# Altium PCB corePCB.PcbDoc (part 2 of 2)
Units mil, origin at the board's own origin, x right, y up, seen from the top; angles counter-clockwise.
Board outline 3543.31 x 3543.31 mil, 4 copper layers (Top Layer, Layer 1, Layer 2, Bottom Layer), stack 23.756 mil thick; 90 components, 158 nets, 640 pads, 386 vias.
Unrouted connection lines stored in the file: 1.
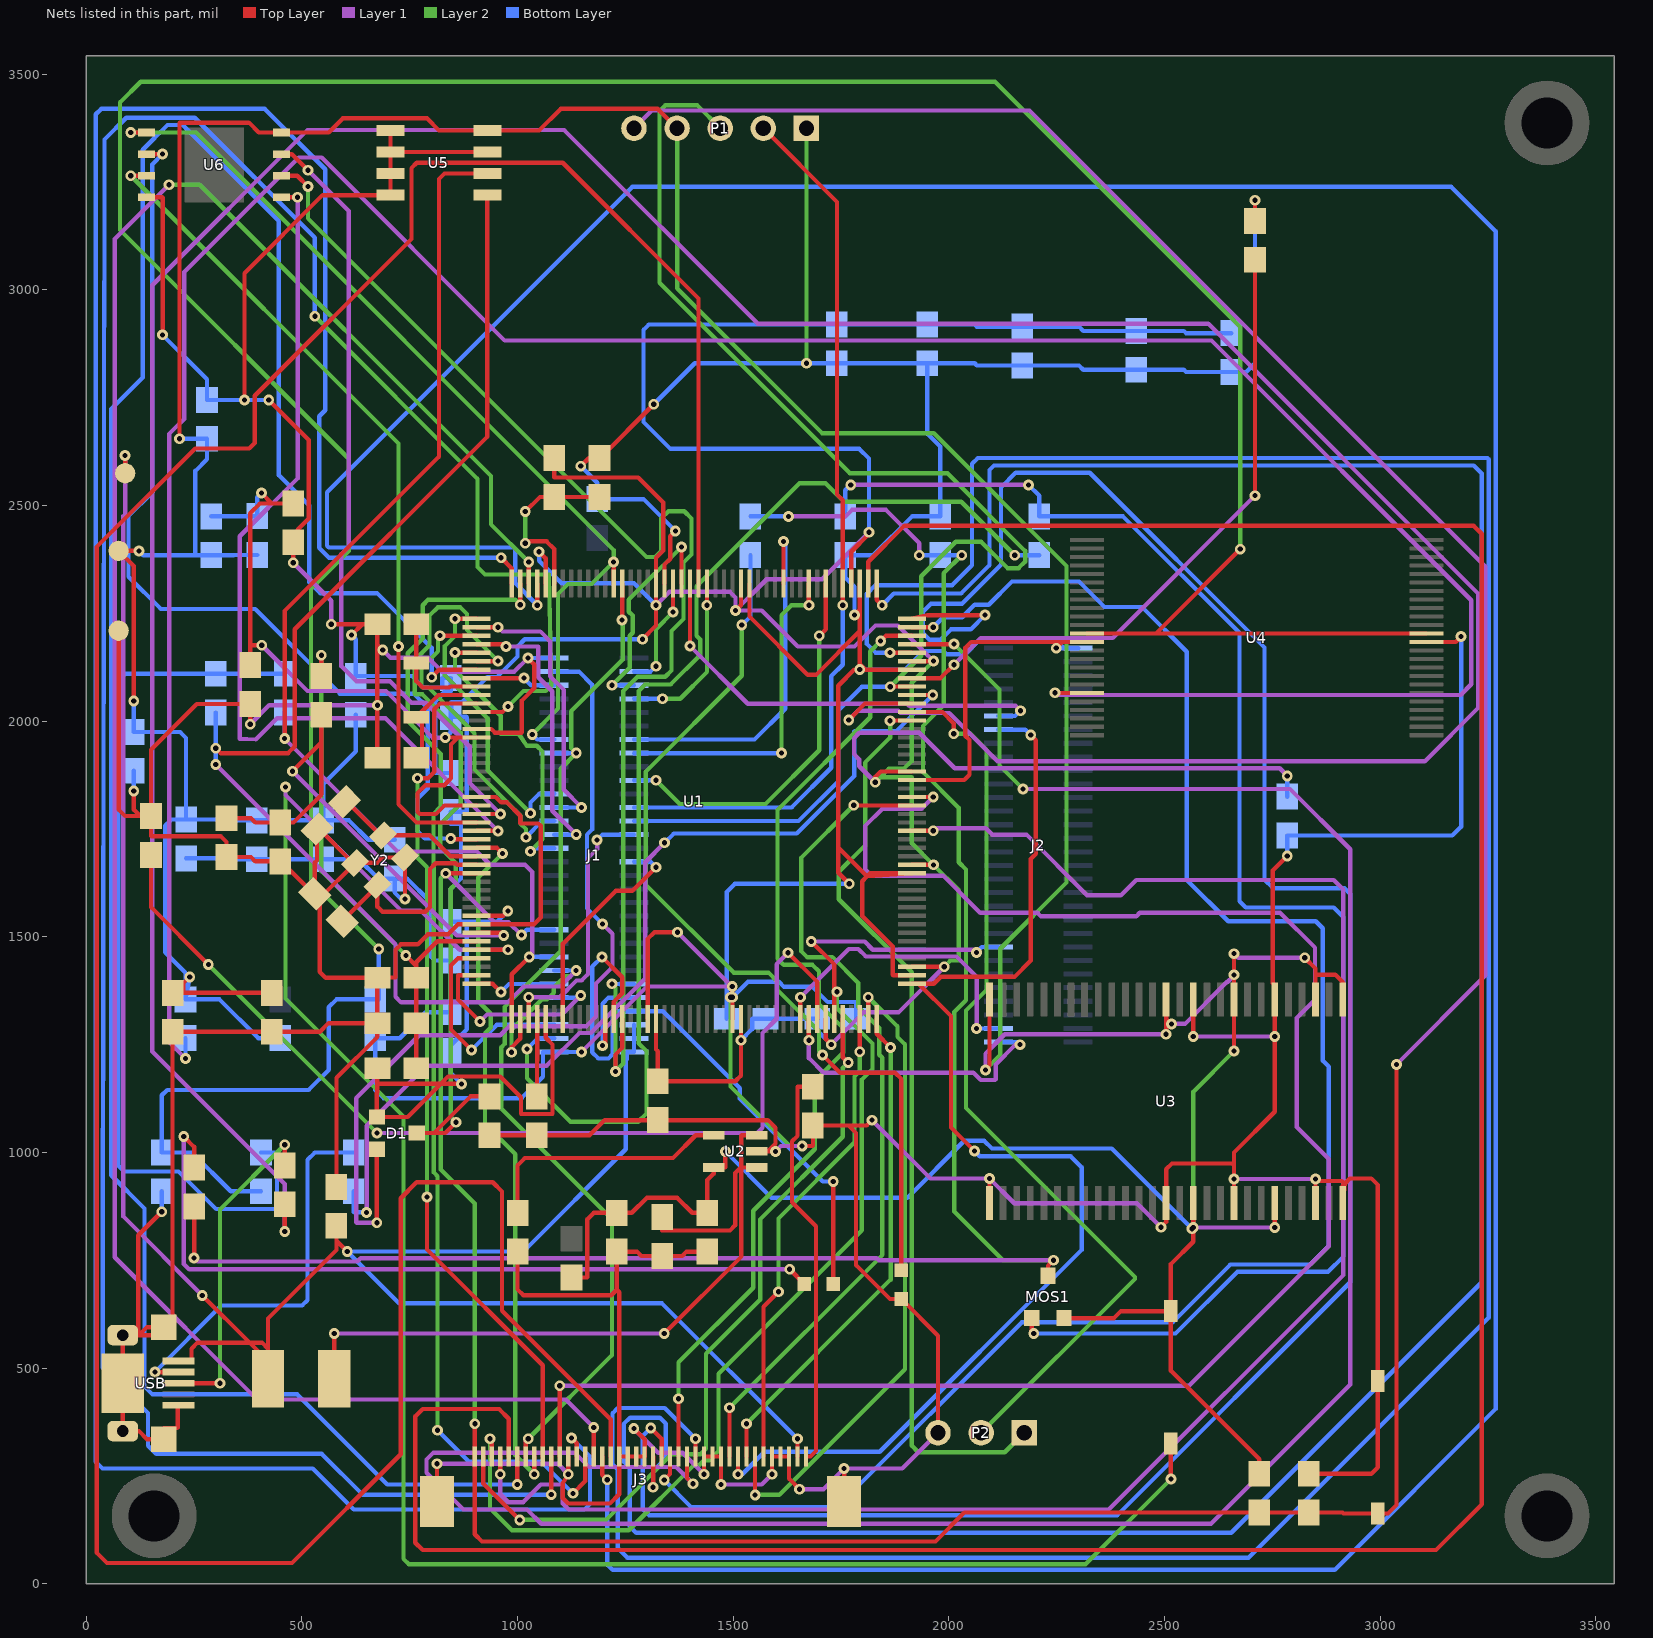
[diagram p4: the nets of this part, all layers, seen from the top]

## Via types
v1: diameter 25, hole 12, Top Layer to Bottom Layer, 386 vias

## Nets (pads, with @x,y where several pads share a name; then routed paths per layer and width w, separated by ;. In a path a pad name is that pad's centre, name@x,y a point inside that pad or via, vN(x,y) a via of type N, cw(c..) or ccw(c..) an arc to the next point about the centre after c; other vN are vias at no path point) (continued)
GND: C1.2 C2.1 C3.2 C4.1 C5.2 C6.1 C7.1 C8.1 C9.1 C10.1 C11.1 C12.2 C13.1 C14.1 C15.1 C16.1 C17.1 C18.1 C19.1 C20.1 C21.1 C22.1 C23.1 C24.1 C25.1 C26.1 C27.1 C28.1 C29.1 C30.1 C31.1 C32.1 C33.2 C34.2 C35.1 C36.1 C37.1 C38.1 C39.1 C40.1 C41.1 C42.1 C43.1 C44.2 C45.2 GND.1 J1.1 J1.30 J2.31 J3.3 J3.4 J3.5 J3.11 J3.12 J3.13 J3.20 J3.21 J3.22 J3.23 J3.29 J3.A J3.B P1.1 P2.3 PWR.2 R1.2 R4.2 R7.2 R14.1 RST.2 U1.14 U1.22 U1.37 U1.61 U1.71 U1.90 U1.102 U1.113 U1.126 U1.135 U1.148 U1.158 U2.2 U3.6 U3.12 U3.28 U3.41 U3.46 U3.52 U3.54 U4.13 U4.36 U5.1 U5.2 U5.3 U5.4 U5.7 U6.4 USB.5 USB.6 USB.7 USB.8 USB.9 Y2.2 Y2.4 | length 31309.2
  Top Layer w10: GND.1@75,2210 75,1795 90,1780 125,1780 ; v1(110,1838) 110,1795 125,1780 ; U6.4@140,3215 176,3215 177,3214 v1(177,2895.94) ; v1(175.06,862.5) 120.5,807.94 120.5,576.22 ; USB.9@180,595 140.78,595 122,576.22 ; USB.5@214,413.82 212,413.82 212,362 211,361 180,361 USB.8@180,335 140.78,335 122,353.78 USB.7@84.65,353.78 84.65,409 85,409.35 USB.9@85,465 85,520 84.65,520.35 USB.6@84.65,576.22 120.5,576.22 ; v1(367,2745) 367,3039 548,3220 U5.4@705.59,3220 U5.3@705.59,3270 U5.2@705.59,3320 ; v1(380,1993) 380.06,1993.06 C26.1@380.06,2040 256.06,2040 150.06,1934 C3.2@150.06,1780 ; v1(423,2745) 516,2652 516,2470 491.5,2445.5 C25.1@480,2415 v1(480,2367.5) ; v1(568,2224.94) 640,2224.94 ; C33.2@580.06,920 580.06,1173.06 675,1268 C6.1@675,1299.94 ; v1(615,2199.94) 640,2224.94 ; C9.1@675,1914.94 v1(675,2037) 675,2165 675,2177.5 ; v1(687.5,2165) 675,2177.5 ; U5.1@705.59,3370 U5.2@705.59,3320 ; v1(739.03,1588) Y2.2@739.03,1684.03 687.53,1684.03 675,1671.5 Y2.4@623.5,1671.5 ; J3.B@813.4,190.57 v1(813.4,278) ; U1.22@905.3,1824.39 949.35,1824.39 961.98,1811.76 975.74,1811.76 1006.5,1781 1006.5,1764 1007.5,1763 1048.5,1763 1054,1757.5 1054,1545 1038.11,1529.11 U1.37@905.3,1529.11 862,1529.11 838.89,1506 792.03,1506 768.53,1482.5 729.5,1482.5 717,1470 717,1405.94 C7.1@675,1404.94 ; U1.14@905.3,1981.87 939.13,1981.87 947.5,1973.5 1009,1973.5 1010,1974.5 1010,2047.98 1038.5,2076.48 1038.5,2131.96 v1(1024,2146.46) ; U5.7@930,3320 U5.2@705.59,3320 ; C1.2@934.94,1040 R1.2@1044.94,1040 1167,1040 1202,1075 C17.1@1325.06,1075 1580.5,1075 1598,1057.5 1598,1020 1580.4,1002.4 ; C30.1@1000.06,770 1000.06,682.5 1013.56,669 1217.5,669 1230.06,681.56 ; J3.29@1117.52,295 v1(1117.52,254) 1104.89,233 1104.89,198.61 1117.5,186 1214.13,186 1235.63,207.5 J3.23@1235.63,295 ; v1(1146.47,2591.47) 1165,2610 R4.2@1190.06,2610 1191,2610 v1(1316,2735) ; v1(1269.69,360) 1294.69,335 J3.20@1294.69,295 J3.21@1275,295 J3.22@1255.32,295 J3.23@1235.63,295 ; U1.61@1301.58,1310 1301.58,1495 1317.38,1510.8 v1(1371.12,1510.8) ; U1.158@1340.95,2319.09 1340.95,2363.45 1354,2376.5 1354,2429.05 v1(1365.95,2441) ; v1(1432.48,253.88) J3.13@1432.48,295 J3.12@1452.17,295 J3.11@1471.85,295 v1(1471.85,230) ; C32.1@1440.06,770 1392,770 1382,760 C29.1@1335.06,760 1287,760 1277,770 C31.1@1230.06,770 1230.06,681.56 ; v1@1496.93,1385 v1(1498,1385) 1498.43,1384.57 v1(1498.43,1360) v1@1498.43,1359.57 ; v1(1498,1360) v1@1498.43,1359.57 ; U1.71@1498.43,1310 v1@1498.43,1359.57 ; U1.148@1537.8,2319.09 1537.8,2242.82 1673.11,2107.5 1691.98,2107.5 1793.7,2209.22 ; U2.2@1555,1002.4 1580.4,1002.4 ; v1(1589.96,253.88) J3.5@1589.96,295 J3.4@1609.65,295 J3.3@1629.33,295 1629.33,243.67 v1(1654,219) ; v1(1598,1002.4) 1580.4,1002.4 ; v1(1660,1015) 1684,1015 1685,1016 C28.1@1685,1062.4 1767.6,1062.4 ; J3.A@1757.28,190.57 v1(1757.28,267) ; v1(1769,1623) 1743.51,1648.49 1743.51,1707.5 ; v1(1781.2,2246.5) 1793.7,2259 ; v1(1793.7,2120) 1793.7,2132.5 ; U1.135@1793.7,2319.09 1793.7,2259 ; v1(1822,1074.9) 1809.5,1062.4 1767.6,1062.4 ; U1.90@1914.39,1411 1871,1411 1870,1412 1870,1477.5 1799.19,1548.31 1799.19,1628.92 1810.64,1640.37 ; U1.113@1914.39,1863.76 2036,1863.76 2048,1875.76 2048,1956.5 2038,1966.5 2038,2170 2051.74,2183.74 2263.29,2183.74 ; U1.126@1914.39,2119.67 1806.54,2119.67 ; P2.3@1975,350 1975,575 PWR.2@1890,660 1863.74,660 1785,738.74 1785,1045 1767.6,1062.4 ; U3.28@2094.53,882.56 v1(2094.53,939.43) ; v1(2249,2169.45) 2263.29,2183.74 ; U4.13@2320,2183.74 2263.29,2183.74 ; v1(2491.91,826.46) 2503.98,838.52 U3.41@2503.98,882.56 2503.98,960.95 2517.5,974.48 2656.98,974.48 2661.46,970 ; v1(2566.97,1268.68) U3.12@2566.97,1355 ; U3.46@2661.46,882.56 v1(2661.46,938.57) 2661.46,970 ; v1(2710,3208) 2710.06,3207.94 C5.2@2710.06,3160 ; v1(2785,1687.5) 2751.44,1653.94 2751.44,1393 2755.95,1388.5 U3.6@2755.95,1355 v1(2755.95,1268.68) 2755.95,1094.49 2661.46,1000 2661.46,970 ; C12.2@2835.06,255 2980,255 2995,270 RST.2@2995,470 2995,924.43 2980,939.43 2930,939.43 2918,927.43 ; U3.52@2850.43,882.56 v1@2850.43,933 ; v1(2850.43,938.57) v1@2850.43,933 ; U4.36@3107.4,2183.74 3175.5,2183.74 v1(3188,2196.24) ; 120.5,576.22 122,576.22 ; 122,576.22 181.28,576.22 200.06,595 C42.1@200.06,1280 C43.1@430.06,1280 542,1280 561.94,1299.94 C6.1@675,1299.94 ; 125,1780 C3.2@150.06,1780 ; C3.2@150.06,1780 150.06,1734 151.06,1733 312.06,1733 325.06,1720 C2.1@325.06,1685 382,1685 392,1675 C4.1@450.06,1675 452,1675 527.05,1599.95 C10.1@529.95,1599.95 529.95,1672 535.05,1677.09 C11.1@535.05,1749.95 540,1749.95 618.45,1671.5 Y2.4@623.5,1671.5 ; Y2.4@623.5,1671.5 541.06,1589.07 541.06,1418.87 555,1404.94 C7.1@675,1404.94 ; 640,2224.94 C8.1@675,2224.94 675,2177.5 ; C6.1@675,1299.94 C7.1@675,1404.94 ; 1230.06,681.56 1235.63,676 J3.23@1235.63,295 ; 1743.51,1707.5 1743.51,2082.18 1781,2119.67 1793.7,2119.67 1806.54,2119.67 ; 1743.51,1707.5 1810.64,1640.37 ; 1793.7,2132.5 1806.54,2119.67 ; 1793.7,2132.5 1793.7,2209.22 ; 1793.7,2209.22 1793.7,2246.5 1793.7,2259 ; 1810.64,1640.37 1817.5,1647.22 U1.102@1914.39,1647.22 1810.64,1640.37 ; v1@2850.43,933 2850.53,933 2911.43,934 2918,927.43 ; 2918,927.43 2913.43,922.86 U3.54@2913.43,882.56 2918,927.43
  Layer 1 w10: v1(380,1993) 424,2037 v1(675,2037) ; v1(480,2367.5) 568,2279.5 v1(568,2224.94) ; v1(687.5,2165) 705.47,2147.03 792.47,2147.03 824.5,2115 992.54,2115 v1(1024,2146.46) ; v1(813.4,278) 1093.52,278 v1(1117.52,254) ; v1(1148.5,1233.07) 1300.43,1385 v1@1496.93,1385 ; v1(1269.69,360) 1326.39,303.3 1383.06,303.3 v1(1432.48,253.88) ; v1(1371.12,1510.8) v1@1496.93,1385 ; v1(1471.85,230) 1566.08,230 v1(1589.96,253.88) ; v1(1498,1385) v1@1496.93,1385 ; v1(1598,1002.4) 1610.6,1015 v1(1660,1015) ; v1(1654,219) 1709.28,219 v1(1757.28,267) 1892,267 P2.3@1975,350 ; v1(1822,1074.9) 1957.47,939.43 v1(2094.53,939.43) 2151.96,882 2436.37,882 v1(2491.91,826.46) ; v1(2566.97,1268.68) v1(2755.95,1268.68) ; v1(2661.46,938.57) v1(2850.43,938.57)
  Layer 2 w10: v1(1494,1360) 1494,1152.91 1631.91,1015 v1(1660,1015) ; v1(1670,2830) P1.1@1670,3375
  Bottom Layer w10: v1(110,1838) C37.1@110,1885 ; v1(175.06,862.5) C36.1@175.06,910 ; v1(177,2895.94) 279.94,2793 C44.2@279.94,2745 v1(367,2745) v1(423,2745) ; C38.1@231.38,1681.93 312,1681.93 313.93,1680 C39.1@394.94,1680 C40.1@549.94,1680 632,1680 677,1635 C41.1@714.94,1635 ; v1(615,2199.94) 624.94,2190 C45.2@624.94,2105 755,2105 781.77,2078.23 825.06,2078.23 825.06,2100 C13.1@845.06,2100 845.06,2069.5 832.5,2069.5 809,2046 809,1881 810,1880 C14.1@845.06,1880 ; v1(739.03,1588) 730,1588 714.94,1603.06 C41.1@714.94,1635 ; v1(1024,2146.46) J1.30@1084.96,2146.46 ; v1(1146.47,2591.47) 1184.94,2553 R7.2@1184.94,2515 1291.95,2515 v1(1365.95,2441) ; v1(1148.5,1233.07) J1.1@1084.96,1233.07 1059,1233.07 1059,1175.5 1009.5,1126 689.06,1126 670.06,1145 C35.1@670.06,1265 727,1265 787,1325 C16.1@845.06,1325 845.06,1384 844.94,1384.13 C15.1@844.94,1445 809,1445 796.5,1457.5 796.5,1582.5 744,1635 C41.1@714.94,1635 ; v1(1316,2735) 1411,2830 v1(1670,2830) C20.1@1740,2830 C21.1@1949.94,2830 ; C18.1@1485,1310.06 1485,1347 ; v1(1494,1360) 1485,1351 ; v1(1498,1360) 1485,1347 ; v1(1498.43,1360) 1534.41,1395.98 1606.02,1395.98 1618,1384 1684,1384 1719,1349 1784,1349 1785,1348 C19.1@1785,1309.94 ; v1(1769,1623) 1504,1623 1485,1604 1485,1351 ; v1(1781.2,2246.5) 1781.2,2311.8 1760.06,2332.94 R14.1@1760.06,2385 1825,2385 1915,2475 C34.2@1980.06,2475 1980.06,2637 1949.94,2667.13 C21.1@1949.94,2830 ; v1(1793.7,2120) 1899,2120 1942,2163 1988,2163 1996,2155 2038,2155 2070,2187 2249,2187 2266.55,2169.45 ; v1(2249,2169.45) 2266.55,2169.45 ; J2.31@2300.04,2169.45 2266.55,2169.45 ; v1(2710,3208) 2710,2830 2690,2810 C24.1@2655,2810 2550,2810 2545,2815 C23.1@2434.94,2815 2312,2815 2302,2825 C22.1@2170,2825 2065,2825 2060,2830 C21.1@1949.94,2830 ; v1(2785,1687.5) C27.1@2785,1735 3167.5,1735 3188,1755.5 v1(3188,2196.24) ; 1485,1347 1485,1351
IIC_SCL: J1.8 R20.1 U1.45 U5.6 | length 2743.3
  Top Layer w10: v1(459.94,1960) 459.94,2255.44 818,2613.5 818,3257.5 830.5,3270 U5.6@930,3270 ; U1.45@986.61,1310 986.61,1413.09 v1(1027.06,1453.54)
  Layer 1 w10: v1(459.94,1960) 721.94,1698 905.87,1698 936.87,1667 1017.5,1667 1034,1650.5 1034,1460.48 v1(1027.06,1453.54)
  Bottom Layer w10: v1(459.94,1960) R20.1@459.94,2020 ; v1(1027.06,1453.54) J1.8@1084.96,1453.54
IIC_SDA: J1.7 R21.1 U1.46 U5.5 | length 3353.9
  Top Layer w10: v1(300.06,1937.44) 311.5,1926 468,1926 483.44,1941.44 483.44,2213.44 930,2660 U5.5@930,3220 ; v1(986,1232.5) 986,1243.7 1006.3,1264 U1.46@1006.3,1310
  Layer 1 w10: v1(300.06,1899.94) 717,1483 717,1361 730,1348 977,1348 1014,1385 1098.88,1385 v1(1135.92,1422.05)
  Layer 2 w10: v1(986,1232.5) 986,1284.62 1014.74,1313.37 1025,1313.37 1026.18,1314.54 1026.18,1324.8 1055.97,1354.59 1068.42,1354.59 1083.83,1370 1083.83,1382.45 1110.23,1408.85 1122.73,1408.85 v1(1135.92,1422.05)
  Bottom Layer w10: v1(300.06,1899.94) v1(300.06,1937.44) R21.1@300.06,2020 ; J1.7@1084.96,1422.05 v1(1135.92,1422.05)
JTCK: J1.42 P1.2 U1.137 | length 2066.1
  Top Layer w10: P1.2@1570,3375 1741,3204 1741,2526 1754.33,2512.67 U1.137@1754.33,2319.09 1754.33,2269.33 v1(1754,2269)
  Bottom Layer w10: J1.42@1270,1800 1635.5,1800 1727.51,1892.01 1727.51,2104.51 1754,2131 v1(1754,2269)
JTMS: J1.43 P1.3 U1.124 | length 3158.2
  Top Layer w10: v1(1864.3,2080) 1864.59,2080.3 U1.124@1914.39,2080.3
  Layer 2 w10: P1.3@1470,3375 1417,3428 1342.5,3428 1329,3414.5 1329,3016.62 1770.62,2575 1997,2575 2177,2395 2177,2370 2162,2355 2136.1,2355 2075.04,2416.06 2016.06,2416.06 1936,2336 1936,2151.7 v1(1864.3,2080)
  Bottom Layer w10: J1.43@1270,1768.5 1651.5,1768.5 1743.51,1860.51 1743.51,2025 1798.51,2080 v1(1864.3,2080)
KEY0: J1.6 U1.44 | length 195.4
  Top Layer w10: U1.44@905.3,1391.32 942.18,1391.32 v1(961.5,1372)
  Bottom Layer w10: v1(961.5,1372) 980.05,1390.55 J1.6@1084.96,1390.55
KEY1: J1.5 U1.43 | length 493.9
  Top Layer w10: U1.43@905.3,1411 862.82,1411 861.81,1410 861.81,1354.69 v1(913,1303.5)
  Layer 1 w10: v1(913,1303.5) 929.5,1320 1102.55,1320 v1(1146.55,1364)
  Bottom Layer w10: J1.5@1084.96,1359.05 1141.61,1359.05 v1(1146.55,1364)
KEY2: J1.28 U1.8 | length 186.5
  Top Layer w10: U1.8@905.3,2099.98 v1(1015,2099.98)
  Bottom Layer w10: v1(1015,2099.98) 1031.52,2083.46 J1.28@1084.96,2083.46
LCD_B3: J3.24 U1.154 | length 7440.2
  Top Layer w10: J3.24@1215.95,295 1215.95,381.05 964,633 964,909.5 942.5,931 766,931 729,894 729,300 477,48 48,48 24,72 24,2404 252.5,2632.5 378,2632.5 390.5,2645 390.5,2754.5 754,3118 754,3282.5 766.5,3295 1105,3295 1419.69,2980.31 U1.154@1419.69,2319.09
LCD_B4: J3.25 U1.173 | length 9017.1
  Top Layer w10: v1(1045.67,2269) U1.173@1045.67,2319.09 ; J3.25@1196.26,295 1196.26,252.74 v1(1208,241)
  Bottom Layer w10: v1(1045.67,2269) 994.5,2320.17 994.5,2399.5 991,2403 562,2403 558,2407 558,2531 1266,3239 3165,3239 3268,3136 3268,405 2895,32 1221,32 1208,45 v1(1208,241)
LCD_B5: J3.26 U1.174 | length 5192.3
  Top Layer w10: U1.174@1025.99,2319.09 v1(1025.99,2369) ; J3.26@1176.58,295 v1(1176.58,362)
  Layer 1 w10: v1(192,3244) 66,3118 66,757 396,427 1111.58,427 v1(1176.58,362)
  Layer 2 w10: v1(192,3244) 263,3244 938.5,2568.5 938.5,2456.49 v1(1025.99,2369)
LCD_B6: J3.27 U1.175 | length 2726.9
  Top Layer w10: v1(1006.3,2270.2) U1.175@1006.3,2319.09 ; v1(1128.39,209.5) 1156.89,238 J3.27@1156.89,295
  Layer 2 w10: v1(814.5,356) 814.5,945 806,953.5 806,1671 805,1672 805,1785 822,1802 822,1924 745.5,2000.5 745.5,2157.5 780,2192 780,2269 792.5,2281.5 995,2281.5 v1(1006.3,2270.2)
  Bottom Layer w10: v1(814.5,356) 888,282.5 1055.39,282.5 v1(1128.39,209.5)
LCD_B7: J3.28 U1.176 | length 6521.6
  Top Layer w10: v1(962,2379) 986.61,2354.39 U1.176@986.61,2319.09 ; v1(1125,338) 1137.21,325.79 J3.28@1137.21,295
  Bottom Layer w10: v1(962,2379) 563,2379 540,2402 540,2707 554,2721 554,3280 414,3420 34.5,3420 22,3407.5 22,282.5 37.5,267 525,267 620,172 1155,172 1168,185 1168,295 v1(1125,338)
LCD_BL: J1.23 J3.34 U1.163 | length 2391.1
  Top Layer w10: J3.34@1019.1,295 1019.1,330.1 v1(1025,336) ; v1(1242.52,2234.48) U1.163@1242.52,2319.09
  Layer 2 w10: v1(1025,336) 1219,530 1219,845 962.5,1101.5 962.5,1244 970,1251.5 970,1337.5 1100,1467.5 1100,1889.98 v1(1136,1925.98) 1124.24,1937.74 1124.24,2023.24 1244,2143 1244,2233 v1(1242.52,2234.48)
  Bottom Layer w10: J1.23@1084.96,1925.98 v1(1136,1925.98)
LCD_CLK: J3.30 U1.111 | length 4282.1
  Top Layer w10: J3.30@1097.84,295 v1(1097.84,459) ; U1.111@1914.39,1824.39 1963.61,1824.39 v1(1964,1824)
  Layer 1 w10: v1(1097.84,459) 2557,459 2881,783 2881,985 2807,1059 2807,1312 2849,1354 2849,1475 2768,1556 2443,1556 2434.5,1547.5 2214,1547.5 2206,1555.5 2073,1555.5 1986.5,1642 1821.5,1642 1806,1657.5 1806,1757 1846,1797 1937,1797 v1(1964,1824)
LCD_DE: J3.33 U1.28 | length 1633.5
  Top Layer w10: U1.28@905.3,1706.28 952.22,1706.28 v1(965,1693.5) ; v1(1038.78,254) J3.33@1038.78,295
  Layer 2 w10: v1(965,1693.5) 909,1637.5 909,1350.5 938,1321.5 938,1289.98 924.64,1276.61 924.64,1066.36 995,996 995,297.78 v1(1038.78,254)
LCD_G2: J3.14 U1.128 | length 6777.5
  Top Layer w10: J3.14@1412.8,295 v1(1412.8,336.2) ; v1(1864,2159) v1(1864,2159) U1.128@1914.39,2159.04
  Bottom Layer w10: v1(1412.8,336.2) 1341.5,407.5 1232.5,407.5 1220,395 1220,277.14 1232.26,264.88 1232.26,82.5 1254.76,60 2695,60 3252,617 3252,2607.5 3249,2610.5 2067.5,2610.5 2054,2597 2054,2361.5 2008.14,2315.64 1830,2315.64 1810,2295.64 1810,2179 1830,2159 v1(1864,2159)
LCD_G3: J3.15 U1.129 | length 5636.6
  Top Layer w10: J3.15@1393.11,295 1393.11,245.39 v1(1406.75,231.75) ; U1.129@1914.39,2178.72 2011.72,2178.72 v1(2012,2179)
  Layer 1 w10: v1(1406.75,231.75) 1368,270.5 1165.5,270.5 1132,304 805,304 789,288 789,257.5 874.5,172 1022,172 1055,139 2608,139 2931,462 2931,1703 2791,1843 v1(2172,1843)
  Layer 2 w10: v1(2012,2179) 2117.5,2073.5 2117.5,1897.5 v1(2172,1843)
LCD_G4: J3.16 U1.130 | length 2327.5
  Top Layer w10: J3.16@1373.43,295 v1(1373.43,429) ; v1(1842,2186) 1854.41,2198.41 U1.130@1914.39,2198.41
  Layer 2 w10: v1(1373.43,429) 1373.43,513.43 1546.5,686.5 1546.5,865 1689,1007.5 1689,1165 1755,1231 1755,1288.5 1699,1344.5 1699,1420 1684,1435 1617.5,1435 1603,1449.5 1603,1794 1818,2009 1818,2162 v1(1842,2186)
LCD_G5: J3.17 U1.131 | length 4259.9
  Top Layer w10: v1(1340,240.52) 1353.74,254.26 J3.17@1353.74,295 ; U1.131@1914.39,2218.09 1964,2218.09 v1(1964.09,2218)
  Bottom Layer w10: v1(1340,240.52) 1402.52,178 1741,178 2169,606 2519,606 2653,740 2838,740 2881,783 2881,1199 2867,1213 2867,1520 2851,1536 2648,1536 2552,1632 2552,2161 2448,2265 2361,2265 2302,2324 2146.56,2324 2092.53,2269.97 2059.97,2269.97 2031,2241 1987.09,2241 v1(1964.09,2218)
LCD_G6: J3.18 U1.132 | length 5386.2
  Top Layer w10: v1(1309,361) 1334.06,335.94 J3.18@1334.06,295 ; U1.132@1914.39,2237.78 1950.22,2246 v1(2084,2246)
  Bottom Layer w10: v1(1309,361) 1290,342 1290,174 1305,159 2391,159 2931,699 2931,1599.5 2917.5,1613 2751.5,1613 2732,1632.5 2732,2171 2327,2576 2155,2576 2121,2542 2121,2363 2030.54,2272.54 1958.54,2272.54 1940,2254 1940,2204 1955,2189 1981,2189 2005,2213 2051,2213 v1(2084,2246)
LCD_G7: J3.19 U1.133 | length 6399.7
  Top Layer w10: v1(1314,223.46) 1314.37,223.84 J3.19@1314.37,295 ; U1.133@1833.07,2319.09 1833.07,2281.43 v1(1845.5,2269)
  Bottom Layer w10: v1(1314,223.46) 1314,261 1344,291 1344,371 1330,385 1261,385 1246,370 1246,283.14 1260.5,268.64 1260.5,132.5 1275,118 2655,118 3236,699 3236,2574.5 3217.5,2593 2105,2593 2094.56,2582.56 2094.56,2361.95 2028.61,2296 1872.5,2296 v1(1845.5,2269)
LCD_HSYNC: J3.31 U1.12 | length 6315.9
  Top Layer w10: U1.12@905.3,2021.24 965.24,2021.24 v1(978,2034) ; v1(1078,206.5) 1078.15,206.65 J3.31@1078.15,295
  Layer 2 w10: v1(530,2939) 907,2562 907,2357.5 924.5,2340 1073,2340 1078,2082.5 1065.5,2070 1014,2070 v1(978,2034)
  Bottom Layer w10: v1(530,2939) 530,3121 251.5,3399.5 92.5,3399.5 42,3349 38,729 38,501 143,396 143,320 162,301 546,301 640.5,206.5 v1(1078,206.5)
LCD_R3: J3.6 U1.86 | length 1107.5
  Top Layer w10: J3.6@1570.28,295 1570.28,642.28 v1(1605,677) ; v1(1793.7,1233.5) U1.86@1793.7,1310
  Layer 2 w10: v1(1605,677) 1605,847 1781.5,1023.5 1781.5,1176.17 1793.7,1188.37 v1(1793.7,1233.5)
LCD_R4: J3.7 U1.87 | length 1505.1
  Top Layer w10: J3.7@1550.59,295 1550.59,206.41 v1(1551,206) ; U1.87@1813.39,1310 v1(1813.39,1360)
  Layer 2 w10: v1(1551,206) 1607,206 1898.39,497.39 1898.39,1250.68 1881.08,1268 1881.08,1292.31 v1(1813.39,1360)
LCD_R5: J3.8 U1.88 | length 1166.7
  Top Layer w10: J3.8@1530.91,295 1530.91,370.91 v1(1531,371) ; U1.88@1833.07,1310 1833.07,1275.18 v1(1865.08,1243.18)
  Layer 2 w10: v1(1531,371) 1865.08,705.08 v1(1865.08,1243.18)
LCD_R6: J2.24 J3.9 U1.89 | length 2861.6
  Top Layer w10: v1(1511,254) 1511.22,254.22 J3.9@1511.22,295 ; U1.89@1914.39,1391.32 U1.89@1930,1391.32 ; v1(2059.5,1003.5) 2005,1058 2005,1316.32 U1.89@1930,1391.32 ; v1(2190,1968) 2202,1956 2202,1692.6 2190,1680.6 2190,1445 2152.19,1407.19 1981.19,1407.19 1965.32,1391.32 U1.89@1930,1391.32
  Bottom Layer w10: v1(1511,254) 1521,254 1573,306 1840,306 2308,774 2308,965.5 2282.5,991 2072,991 v1(2059.5,1003.5) ; J2.24@2115,1980.47 2177.53,1980.47 v1(2190,1968)
LCD_R7: J3.10 U1.110 | length 1954.6
  Top Layer w10: J3.10@1491.54,295 v1(1491.54,408) ; v1(1779.5,1805) 1779.79,1804.71 U1.110@1914.39,1804.71
  Layer 2 w10: v1(1491.54,408) 1846,762.46 1846,1219.68 1838.89,1226.78 1838.89,1288.61 1789.89,1337.61 1789.89,1393.16 1730.06,1452.99 1671.51,1452.99 1657.65,1466.85 1657.65,1683.15 v1(1779.5,1805)
LCD_VSYNC: J3.32 U1.11 | length 1987.4
  Top Layer w10: v1(768,1867.71) 792.5,1867.71 807,1882.21 807,2027.93 820,2040.93 U1.11@905.3,2040.93 ; v1(790,897) 790,775 1058.47,506.53 J3.32@1058.47,295
  Layer 2 w10: v1(768,1867.71) 768,1683.39 790,1661.39 v1(790,897)
LED0: DS0.2 J1.57 U1.57 | length 1485.3
  Top Layer w10: v1(1196,1453.5) 1243,1406.5 1243,1369 1222.84,1348.84 U1.57@1222.84,1310 ; DS0.2@1731.93,695 v1(1731.93,932.63)
  Bottom Layer w10: v1(1196,1453.5) 1173,1430.5 1173,1232.5 1187.5,1218 1211,1218 1221,1228 1221,1326.56 1222,1327.56 J1.57@1270,1327.56 1337,1327.56 1515.34,1149.22 1515.34,1125.04 1707.75,932.63 v1(1731.93,932.63)
LED1: J1.56 U1.56 | length 241.1
  Top Layer w10: v1(1197,1247.65) 1203.15,1253.8 U1.56@1203.15,1310
  Bottom Layer w10: v1(1197,1247.65) 1197,1345 1211.05,1359.05 J1.56@1270,1359.05
NetC1_1: C1.1 D1.3 U1.6 | length 1843.4
  Top Layer w10: D1.3@766.26,1045 806.06,1045 ; v1(857.5,1070) 832.5,1045 806.06,1045 ; U1.6@905.3,2139.35 v1(955,2139.35) ; C1.1@934.94,1130 891.06,1130 806.06,1045
  Layer 2 w10: v1(857.5,1070) 845,1082.5 845,1611.72 857,1623.72 857,1670.72 821,1706.72 821,1761.55 868,1808.55 868,1974 779.77,2062.23 763,2062.23 761.5,2063.73 761.5,2141.5 796,2176 796,2245 815,2264 867.5,2264 883,2248.5 883,2211.35 v1(955,2139.35)
NetC2_2: C2.2 C4.2 R2.1 U1.38 | length 1244.3
  Top Layer w10: C2.2@325.06,1775 382,1775 392,1765 C4.2@450.06,1765 480.5,1765 545.06,1829.56 545.06,1951.06 ; v1(478,1884) 545.06,1951.06 ; R2.1@545.06,2015 545.06,1951.06 ; U1.38@905.3,1509.43 961.57,1509.43 v1(968,1503)
  Layer 1 w10: v1(478,1884) 859,1503 v1(968,1503)
NetC3_1: C3.1 U1.81 | length 2372.4
  Top Layer w10: C3.1@150.06,1690 150.06,1568.94 v1(283,1436) ; v1(1627.28,1463) 1695.28,1395 U1.81@1695.28,1310
  Layer 1 w10: v1(674,1045) 1555.5,1045 1568,1057.5 1568,1277 1601,1310 1601,1436.72 v1(1627.28,1463)
  Layer 2 w10: v1(283,1436) v1(674,1045)
NetC5_1: C5.1 U1.125 | length 1517.9
  Top Layer w10: U1.125@1914.39,2099.98 1980.98,2099.98 v1(2012,2131) ; v1(2710.06,2523.06) C5.1@2710.06,3070
  Layer 1 w10: v1(2012,2131) 2074,2193 2380,2193 v1(2710.06,2523.06)
NetC8_2: C8.2 U1.9 Y1.1 | length 279.4
  Top Layer w10: C8.2@765,2224.94 Y1.1@765,2135 765,2093 780,2078 842,2078 844.3,2080.3 U1.9@905.3,2080.3
NetC9_2: C9.2 U1.10 Y1.2 | length 282.7
  Top Layer w10: C9.2@765,1914.94 778.5,1914.94 778.5,2009.02 Y1.2@765,2009.02 816.59,2060.61 U1.10@905.3,2060.61
NetC10_2: C10.2 U1.30 Y2.1 | length 501.2
  Top Layer w10: C10.2@593.59,1536.32 593.59,1537 Y2.1@675,1618.41 ; Y2.1@675,1620 Y2.1@675,1618.41 ; U1.30@905.3,1666.91 860.23,1666.91 856.42,1670.72 810.14,1670.72 796.92,1657.5 796.92,1568.92 786,1558 687,1558 675,1570 Y2.1@675,1618.41
NetC11_2: C11.2 U1.29 Y2.3 | length 359.2
  Top Layer w10: C11.2@598.68,1813.59 604,1813.59 682.06,1735.53 Y2.3@687.53,1735.53 796.06,1735.53 844.87,1686.72 872.42,1686.72 872.55,1686.59 U1.29@905.3,1686.59
NetC28_2: C28.2 J3.1 | length 937
  Top Layer w10: J3.1@1668.7,295 1679.5,295 1692,307.5 1692,829 1636.5,884.5 1636.5,1026 1649,1038.5 1649,1151.4 1650,1152.4 C28.2@1685,1152.4
NetC29_2: C29.2 F1.2 U2.1 U2.3 | length 1895.8
  Top Layer w10: F1.2@575,475 v1(575,580) ; C29.2@1335.06,850 1335.06,819.5 1335.56,819 1492.5,819 1505,831.5 1505,952.5 1517.5,965 1519,965 ; v1(1340,580) 1519,759 1519,965 ; U2.1@1555,965 1519.5,965 ; U2.3@1555,1039.8 1520,1039.8 1519,1038.8 ; 1519,965 1519.5,965 ; 1519,965 1519,965.5 ; 1519,965.5 1519,1038.8 ; 1519,965.5 1519.5,965 ; 1519,965.5 1518.5,966 1518.5,1038.3 1519,1038.8
  Layer 1 w10: v1(575,580) v1(1340,580)
NetC30_2: C30.2 U2.4 | length 593.8
  Top Layer w10: C30.2@1000.06,860 1000.06,970 1017.06,987 1360.39,987 1413.2,1039.8 U2.4@1455,1039.8
NetC35_2: C35.2 C36.2 R16.1 U4.12 U4.37 | length 7913.4
  Top Layer w10: U4.12@2320,2203.43 2480.43,2203.43 ; v1(2676,2399) 2480.43,2203.43 ; U4.37@3107.4,2203.43 2480.43,2203.43
  Layer 2 w10: v1(678,1472) 521,1629 521,2307 608.5,2394.5 608.5,2608.57 78.21,3138.86 78.21,3435 126.21,3483 2107,3483 2676,2914 v1(2676,2399)
  Bottom Layer w10: R16.1@405.06,910 335,910 245,1000 C36.2@175.06,1000 175.06,1132.5 187.56,1145 515.5,1145 562,1191.5 562,1337 580,1355 C35.2@670.06,1355 678,1355 v1(678,1472)
NetDS0_1: DS0.1 R10.2 | length 1835.7
  Top Layer w10: v1(226,1037) 250,1013 R10.2@250,965 ; v1(1631,729) DS0.1@1665,695
  Layer 1 w10: v1(226,1037) 226,741.5 238.5,729 v1(1631,729)
NetMOS1_1: MOS1.1 R13.2 R14.2 | length 3644.9
  Top Layer w10: MOS1.1@2192.6,615.79 2192.6,584.31 v1(2196.9,580)
  Layer 1 w10: v1(1772.56,2548) v1(2185,2548)
  Bottom Layer w10: R14.2@1760.06,2475 1760.06,2535.5 v1(1772.56,2548) ; v1(2185,2548) 2210.06,2522.94 R13.2@2210.06,2475 2404,2475 2674,2205 2674,1582.5 2688.5,1568 2892.5,1568 2915,1545.5 2915,759 2879.55,723.55 2669.46,723.55 2525.91,580 v1(2196.9,580)
NetPWR_1: PWR.1 R15.1 | length 2126
  Top Layer w10: v1(1707,1226) 1748,1185 1875,1185 1890,1170 PWR.1@1890,726.93
  Layer 2 w10: v1(1520,2223) 1520,2105.5 1297,1882.5 1297,1621.5 1501.5,1417 1582.14,1417 1601.91,1397.23 1601.91,1378.09 1699.09,1280.91 1699.09,1233.91 v1(1707,1226)
  Bottom Layer w10: v1(1520,2223) 1540.06,2243.06 R15.1@1540.06,2385
NetR1_1: R1.1 U1.48 | length 180.3
  Top Layer w10: R1.1@1044.94,1130 1044.94,1212.27 1045.67,1213.01 U1.48@1045.67,1310
NetR4_1: R4.1 R5.1 U1.171 | length 416.2
  Top Layer w10: v1(1018,2412.5) 1022.5,2417 1067.5,2417 1085.04,2399.46 U1.171@1085.04,2319.09 ; v1(1018,2486) 1052,2520 R5.1@1085.06,2520 R4.1@1190.06,2520
  Layer 2 w10: v1(1018,2412.5) v1(1018,2486)
NetR11_2: R11.2 USB.3 | length 759.2
  Top Layer w10: USB.3@214,465 v1(310,465) ; v1(460,1018) 460.06,1017.94 R11.2@460.06,970
  Layer 2 w10: v1(310,465) 310,868 v1(460,1018)
NetR12_2: R12.2 USB.2 | length 917.7
  Top Layer w10: v1(159,491) 159.41,490.59 USB.2@214,490.59
  Bottom Layer w10: v1(159,491) 313,645 500.5,645 513,657.5 513,983 530,1000 R12.2@620,1000
NetR18_1: R18.1 U4.19 | length 6666.9
  Top Layer w10: v1(2246.18,2066) 2246.55,2065.63 U4.19@2320,2065.63
  Layer 1 w10: v1(230,1218) 192,1256 192,2666 227,2701 227,3041.5 492.5,3307 546,3307 970,2883 2609,2883 3211.5,2280.5 3211.5,2085.5 3187,2061 2251.18,2061 v1(2246.18,2066)
  Bottom Layer w10: v1(230,1218) 230.06,1218.06 R18.1@230.06,1265
NRF_CE: J2.25 U1.155 | length 1028.9
  Top Layer w10: v1(1400,2174.5) U1.155@1400,2319.09
  Layer 1 w10: v1(1400,2174.5) 1534,2040.5 1903.5,2040.5 1908.26,2035.74 2154.73,2035.74 v1(2166,2024.47)
  Bottom Layer w10: J2.25@2115,2011.97 2153.5,2011.97 v1(2166,2024.47)
NRF_CS: J1.34 U1.153 | length 400.4
  Top Layer w10: v1(1439,2269) 1439.37,2269.37 U1.153@1439.37,2319.09
  Layer 2 w10: v1(1336,2051.97) 1377.08,2051.97 1439.5,2114.39 1439.5,2268.5 v1(1439,2269)
  Bottom Layer w10: J1.34@1270,2051.97 v1(1336,2051.97)
PA0: U1.40 WKUP.1 | length 4607.8
  Top Layer w10: U1.40@905.3,1470.06 977.88,1470.06 v1(977.94,1470) ; v1(2515,243) WKUP.1@2515,325
  Layer 1 w10: v1(462,1847.5) 462,1829 730,1561 775,1561 866,1470 v1(977.94,1470)
  Layer 2 w10: v1(462,1847.5) 462,1357 735.5,1083.5 735.5,57.5 748,45 2317,45 v1(2515,243)
PA1: J1.3 U1.41 | length 498.3
  Top Layer w10: v1(893.5,1237.5) 845.81,1285.19 845.81,1434.19 862,1450.37 U1.41@905.3,1450.37
  Bottom Layer w10: v1(893.5,1237.5) 952.06,1296.06 J1.3@1084.96,1296.06
PA3: J1.44 U1.47 | length 620.1
  Top Layer w10: U1.47@1025.99,1310 v1(1026,1360)
  Layer 1 w10: v1(1026,1360) 1098.05,1360 1136.59,1398.55 1148.55,1398.55 1163.5,1413.5 1163.5,1682.47 1184.5,1703.47 v1(1184.5,1724.51)
  Bottom Layer w10: v1(1184.5,1724.51) 1197,1737.01 J1.44@1270,1737.01
PA5: J1.46 U1.51 | length 519.8
  Top Layer w10: U1.51@1104.73,1310 1104.73,1483.73 1227.52,1606.52 1266.02,1606.52 v1(1321,1661.5)
  Bottom Layer w10: J1.46@1270,1674.02 1308.48,1674.02 v1(1321,1661.5)
PA9: P2.1 U1.120 | length 2136.5
  Top Layer w10: v1(1864,2001) 1864.56,2001.56 U1.120@1914.39,2001.56
  Layer 2 w10: v1(1864,2001) 1864,1962 1806.01,1904.01 1806.01,1712.01 1745.01,1651.01 1745.01,1587.24 1914.39,1417.85 1914.39,320 1929.39,305 2130,305 P2.1@2175,350
PA10: P2.2 U1.121 | length 2136.8
  Top Layer w10: U1.121@1914.39,2021.24 1985.26,2021.24 2011.5,1995 v1(2011.5,1971)
  Layer 2 w10: v1(2011.5,1971) 2050.39,1971 2087.5,1933.89 2087.5,1376.5 2040,1329 2040,1103 2431.62,711.38 2431.62,706.62 P2.2@2075,350
PA11: R11.1 U1.122 | length 8049
  Top Layer w10: v1(460.06,817) R11.1@460.06,880 ; v1(1768,2003) 1805.93,2040.93 U1.122@1914.39,2040.93
  Layer 1 w10: v1(460.06,817) 460.06,926.94 153,1234 153,3011 513,3371 1108,3371 1557,2922 2601.67,2922 3227.5,2296.17 3227.5,2030.5 3104,1907 2113,1907 2001,2019 1888,2019 1882.5,2024.5 1789.5,2024.5 v1(1768,2003)
PA12: R12.1 U1.123 | length 2273.4
  Top Layer w10: U1.123@1914.39,2060.61 1962.61,2060.61 v1(1963,2061)
  Layer 1 w10: v1(650,861) 650,1062 789,1201 1067.5,1201 1143.5,1277 1169.8,1277 1296,1403.2 1296,1673 v1(1341,1718)
  Bottom Layer w10: R12.1@620,910 620,862 621,861 v1(650,861) ; v1(1341,1718) 1362.48,1739.48 1647.48,1739.48 1781,1873 1781,1976 1782,1977 1879,1977 v1(1963,2061)
PB2: J1.55 U1.58 U6.6 | length 3233.8
  Top Layer w10: U6.6@452.99,3265 489,3265 v1(514,3240) ; v1(1227,1187.96) 1227,1226.99 1242.52,1242.51 U1.58@1242.52,1310
  Layer 2 w10: v1(514,3240) 514,3166 1299,2381 1319,2381 1333,2395 1333,2470 1350,2487 1386.5,2487 1403.5,2470 1403.5,2386.54 1385,2368.04 1385,2237 1357,2209 1357,2117.5 1342.5,2103 1278,2103 1245,2070 1245,1205.96 v1(1227,1187.96) 1227,1383 v1(1219,1391)
  Bottom Layer w10: v1(1219,1391) 1219.45,1390.55 J1.55@1270,1390.55
PB6: J1.24 U1.164 U6.1 | length 2201.6
  Top Layer w10: v1(103,3365) U6.1@140,3365 ; U1.164@1222.84,2319.09 v1(1222.84,2369.08)
  Layer 2 w10: v1(103,3365) 255,3365 1222.84,2397.16 v1(1222.84,2369.08) 1171.76,2318 1117,2318 1094,2295 1094,2029.5 v1(1034,1969.5)
  Bottom Layer w10: v1(1034,1969.5) 1046.02,1957.48 J1.24@1084.96,1957.48
PB10: J2.2 U1.79 | length 702.2
  Top Layer w10: U1.79@1655.91,1310 1655.91,1359.91 v1(1656,1360)
  Layer 1 w10: v1(1656,1360) 1768,1472 1790,1472 1807.8,1454.19 2017.97,1454.19 2064.5,1407.66 v1(2064.5,1287.56)
  Bottom Layer w10: v1(2064.5,1287.56) J2.2@2115,1287.56
PB11: J2.1 U1.80 | length 708.3
  Top Layer w10: v1(1675.59,1260) U1.80@1675.59,1310
  Layer 1 w10: v1(1675.59,1260) 1675.59,1218.82 1709.41,1185 2057,1185 2074,1168 2107.21,1168 2108.71,1169.5 2108.71,1204 2154.71,1250 v1(2165,1250)
  Bottom Layer w10: J2.1@2115,1256.06 2158.94,1256.06 v1(2165,1250)
PC10: J1.40 U1.139 | length 896.9
  Top Layer w10: v1(1699.73,2198) 1714.96,2213.23 U1.139@1714.96,2319.09
  Layer 2 w10: v1(1321,1863) 1376,1808 1575,1808 1699.73,1932.73 v1(1699.73,2198)
  Bottom Layer w10: J1.40@1270,1862.99 v1(1321,1863)
PC12: J1.38 U1.141 | length 785.2
  Top Layer w10: v1(1675.59,2269) U1.141@1675.59,2319.09
  Layer 2 w10: v1(1612,1925.98) 1612,2246 1635,2269 v1(1675.59,2269)
  Bottom Layer w10: J1.38@1270,1925.98 v1(1612,1925.98)
PD2: J1.37 U1.144 | length 867.5
  Top Layer w10: U1.144@1616.54,2319.09 1616.54,2416.07 v1(1617,2416.54)
  Bottom Layer w10: J1.37@1270,1957.48 1549.48,1957.48 1621,2029 1621,2412.54 v1(1617,2416.54)
PE2: J1.20 U1.1 | length 681.9
  Top Layer w10: v1(854.78,2237.78) U1.1@905.3,2237.78
  Layer 2 w10: v1(854.78,2237.78) 854.78,2197.78 831.5,2174.5 831.5,2106.09 931,2006.59 931,1885.5 v1(1030,1786.5)
  Bottom Layer w10: v1(1030,1786.5) 1030,1811.5 1050,1831.5 J1.20@1084.96,1831.5
PE3: J1.19 U1.2 | length 663
  Top Layer w10: U1.2@905.3,2218.09 v1(955,2218.09)
  Layer 1 w10: v1(955,2218.09) 965.09,2208 1053,2208 1076,2185 1076,2104 1107.5,2072.5 1107.5,1841 v1(1148.5,1800)
  Bottom Layer w10: J1.19@1084.96,1800 v1(1148.5,1800)
PE4: J1.18 U1.3 | length 760.2
  Top Layer w10: v1(820,2198.41) U1.3@905.3,2198.41
  Layer 2 w10: v1(820,2198.41) 815.5,2193.91 815.5,2162 777.5,2124 777.5,2079.73 779,2078.23 793.77,2078.23 900,1972 900,1888 1006.5,1781.5 1006.5,1763 1019.5,1750 v1(1019.5,1731)
  Bottom Layer w10: v1(1019.5,1731) 1057,1768.5 J1.18@1084.96,1768.5
PE5: J1.17 U1.4 | length 668.2
  Top Layer w10: U1.4@905.3,2178.72 967.63,2178.72 v1(973,2173.35)
  Layer 1 w10: v1(973,2173.35) 1047,2173.35 1048,2172.35 1048,2102 1080.5,2069.5 1080.5,1792.5 v1(1136,1737)
  Bottom Layer w10: J1.17@1084.96,1737.01 v1(1136,1737)
PE6: J1.16 U1.5 | length 700.5
  Top Layer w10: v1(855,2159.04) U1.5@905.3,2159.04
  Layer 2 w10: v1(855,2159.04) 855,2118.78 961,2012.78 961,1971.2 1003.58,1970.2 1021.54,1942.99 1044.5,1942.99 1058,1929.49 1058,1726.5 v1(1029.74,1698.24)
  Bottom Layer w10: v1(1029.74,1698.24) 1037.01,1705.51 J1.16@1084.96,1705.51
PF6: U1.24 U6.7 | length 1888.2
  Top Layer w10: U6.7@452.99,3315 476.5,3315 v1(514,3277.5) ; U1.24@905.3,1785.02 v1(960.5,1785.02)
  Layer 1 w10: v1(514,3277.5) 608.5,3183 608.5,2404 591.5,2387 591.5,2127.57 626.52,2092.55 704.26,2092.55 754.08,2042.74 787.26,2042.74 889,1941 889,1856.52 v1(960.5,1785.02)
PF7: U1.25 U6.3 | length 1950.7
  Top Layer w10: v1(103,3265) U6.3@140,3265 ; v1(724,2173.24) 724,1807.21 765.87,1765.34 U1.25@905.3,1765.34
  Layer 2 w10: v1(103,3265) 724,2644 v1(724,2173.24)
PF8: U1.26 U6.5 | length 2125.5
  Top Layer w10: U6.5@452.99,3215 v1(490,3215) ; U1.26@905.3,1745.65 v1(955,1745.65)
  Layer 1 w10: v1(490,3215) 490,2563 356,2429 356,1959.5 393,1957.5 442.5,2007 693.65,2007 v1(955,1745.65)
PF9: U1.27 U6.2 | length 2310.8
  Top Layer w10: U6.2@140,3315 v1(177,3315) ; v1(845,1728) 847.03,1725.97 U1.27@905.3,1725.97
  Bottom Layer w10: v1(177,3315) 153,3291 153,2531 98,2476 98,2335 173,2260 392,2260 588,2064 759,2064 792,2031 792,1844 768,1820 768,1745 785,1728 v1(845,1728)
PG3: J3.37 U1.107 | length 4326.9
  Top Layer w10: v1(960,254) v1(960,254) J3.37@960.04,295 ; U1.107@1914.39,1745.65 1963.65,1745.65 v1(1964,1746)
  Layer 1 w10: v1(960,254) 960,207.5 978.5,189 1013,189 1054,230 1103.89,230 1104.89,229 1104.89,186 1118.89,172 2371,172 2915,716 2915,1609.5 2892.5,1632 2434.5,1632 2399,1596.5 2320.5,1596.5 2180,1737 2101,1737 2086,1752 1970,1752 v1(1964,1746)
PG13: J1.33 U1.156 | length 530.7
  Top Layer w10: v1(1380,2404) 1380.32,2403.68 U1.156@1380.32,2319.09
  Layer 2 w10: v1(1219,2083.46) 1260,2124.46 1260,2198 1267,2205 1267,2245 1258,2254 1258,2282 v1(1380,2404)
  Bottom Layer w10: v1(1219,2083.46) J1.33@1270,2083.46
PG14: J1.32 U1.157 | length 264.2
  Top Layer w10: v1(1360.63,2252.98) U1.157@1360.63,2319.09
  Layer 2 w10: v1(1321,2127.46) 1321,2213.35 v1(1360.63,2252.98)
  Bottom Layer w10: J1.32@1270,2114.96 1308.5,2114.96 v1(1321,2127.46)
PH6: J2.8 J3.38 U1.83 | length 2737.2
  Top Layer w10: v1(936,336) 940.36,331.64 J3.38@940.36,295 ; v1(1681.15,1489) 1734.65,1435.5 v1@1734.65,1366.15 ; U1.83@1734.65,1310 v1@1734.65,1366.15 ; v1(1741,1372.5) v1@1734.65,1366.15
  Layer 1 w10: v1(1681.15,1489) 1805,1489 1823.8,1470.19 2057.81,1470.19 v1(2064,1464)
  Layer 2 w10: v1(936,336) 936,175 987,124 1258,124 1408,274 1420,274 1432,286 1444.5,286 1466,307.5 1466,487 1798.5,819.5 1798.5,1169 1822.89,1193.39 1822.89,1252.61 1741,1334.5 v1(1741,1372.5)
  Bottom Layer w10: v1(2064,1464) 2076.54,1476.54 J2.8@2115,1476.54
PH7: J3.39 U1.84 | length 1821.1
  Top Layer w10: J3.39@920.67,295 920.67,232.33 v1(1005,148) ; U1.84@1754.33,1310 1754.33,1221 v1(1766.83,1208.5)
  Layer 2 w10: v1(1005,148) 1205,148 1357.51,300.51 1424.51,300.51 1437,313 1437,533.11 1562.5,658.61 1562.5,844.5 1754.33,1036.33 1754.33,1196 v1(1766.83,1208.5)
PI3: J3.36 U1.134 | length 6903.6
  Top Layer w10: J3.36@979.73,295 979.73,382.5 957.23,405 780,405 763,388 763,95 780,78 3130,78 3236,184 3236,2434.5 3217.5,2453 1896.39,2453 1813.39,2370 U1.134@1813.39,2319.09
PI8: J3.35 U1.7 | length 5777.9
  Top Layer w10: v1(801,2102) 818.67,2119.67 U1.7@905.3,2119.67 ; v1(999.41,230) J3.35@999.41,295
  Bottom Layer w10: v1(801,2102) 801,2170 674,2297 542.5,2297 517,2322.5 517,2500 446.5,2570.5 446.5,3159.5 223.5,3382.5 188.5,3382.5 131,3325 131,2797 58,2724 58,947 135,870 135,457.5 153.5,439 489,439 698,230 v1(999.41,230)
RESET: C12.1 J1.10 J3.40 P1.5 R6.1 RST.1 U1.31 | length 8829.2
  Top Layer w10: v1(833.5,1647.22) U1.31@905.3,1647.22 ; v1(900.99,371) J3.40@900.99,295 900.99,114.51 917.5,98 1969,98 2036,165 R6.1@2720.06,165 C12.1@2835.06,165 2913,165 2915.09,162.91 RST.1@2995,162.91 3018.41,162.91 3038,182.5 v1(3038,1204)
  Layer 1 w10: v1(833.5,1647.22) 946.72,1534 979,1534 v1(1009,1504) ; P1.5@1270,3375 1311,3416 2187,3416 3244,2359 3244,1410 v1(3038,1204)
  Layer 2 w10: v1(833.5,1647.22) 822,1635.72 822,960.5 900.99,881.51 v1(900.99,371)
  Bottom Layer w10: v1(1009,1504) 1021.53,1516.53 J1.10@1084.96,1516.53
VBAT: D1.2 J1.29 | length 2056.3
  Top Layer w10: v1(673.74,837) D1.2@673.74,1007.6
  Layer 1 w10: v1(673.74,837) 627,837 626,838 626,1126 772,1272 960,1272 981,1293 1160,1293 1182,1315 1182,1392 1220,1430 1220,1507 v1(1197,1530)
  Bottom Layer w10: J1.29@1084.96,2114.96 1142.5,2114.96 1173,2084.46 1173,1749 1161,1737 1161,1566 v1(1197,1530)
VCC: R16.2 R20.2 R21.2 | length 2093.7
  Bottom Layer w10: R16.2@405.06,1000 441,1000 442,999 442,870 441,869 301,869 214,956 88,956 74,970 74,2095 89,2110 R21.2@300.06,2110 R20.2@459.94,2110
VCC3.3: 3.3V.1 C31.2 C32.2 C37.2 C38.2 C39.2 C40.2 C41.2 C42.2 C43.2 C44.1 C45.1 MOS1.2 P1.4 R6.2 R8.1 R9.1 R17.1 R18.2 R19.1 U2.5 U3.1 U3.3 U3.9 U3.14 U3.27 U3.43 U3.49 U5.8 U6.8 WKUP.2 | length 13164.1
  Top Layer w10: v1(110,2047) 110,2360 3.3V.1@75,2395 v1(122,2395) ; C42.2@200.06,1370 225.5,1370 ; v1(216,2655) 216,3387 217,3388 377,3388 400,3365 U6.8@452.99,3365 562,3365 595,3398 790,3398 818,3370 U5.8@930,3370 1050,3370 1100,3420 1325,3420 P1.4@1370,3375 ; v1(240,1407.13) 225.5,1392.63 225.5,1370 ; C43.2@430.06,1370 225.5,1370 ; R19.1@1125.06,710 1161,710 1162,711 1162,845 1177,860 C31.2@1230.06,860 1265,860 1300,895 1370,895 1405,860 C32.2@1440.06,860 1440.06,935.93 1455,950.87 U2.5@1455,965 1482,966 v1(1482,1002) ; v1(2085,1191.5) 2094.53,1201.03 U3.27@2094.53,1355 ; MOS1.2@2267.4,615.79 2383,615.79 2399.3,632.09 WKUP.2@2515,632.09 ; v1(2503.98,1274) 2503.98,1310.63 ; U3.14@2503.98,1355 2503.98,1310.63 ; v1(2516.48,1298.13) 2503.98,1310.63 ; v1(2566.97,826) 2566.97,823 2566.97,793.16 2515,741.19 WKUP.2@2515,632.09 ; v1(2566.97,826) U3.43@2566.97,882.56 ; v1(2661.46,1235) U3.9@2661.46,1355 v1(2661.46,1411.87) v1(2661.46,1461) ; R6.2@2720.06,255 2720.06,288.94 2515,494 WKUP.2@2515,632.09 ; U3.49@2755.95,882.56 2755.95,826.05 v1(2756,826) ; v1(2825.43,1451.37) 2850.43,1426.37 2850.43,1411.87 ; U3.3@2850.43,1355 2850.43,1411.87 ; U3.1@2913.43,1355 2913.43,1395 2896.43,1412 2850.56,1412 2850.43,1411.87
  Layer 1 w10: v1(2085,1191.5) 2085,1229 2130,1274 v1(2503.98,1274) ; v1(2516.48,1298.13) 2547.72,1298.13 2644.08,1394.49 2645.7,1394.49 2658.71,1407.5 2658.71,1409.12 v1(2661.46,1411.87) ; v1(2564,823) v1(2566.97,826) ; v1(2566.97,826) v1(2756,826) ; v1(2661.46,1461) 2671.09,1451.37 v1(2825.43,1451.37)
  Layer 2 w10: P1.4@1370,3375 1370,3004 1706,2668 1965,2668 2273,2360 2273,1626 2119.5,1472.5 2119.5,1226 v1(2085,1191.5) ; v1(2566.97,826) 2567,1140.54 v1(2661.46,1235)
  Bottom Layer w10: v1(110,2047) C37.2@110,1975 217.5,1975 231.38,1961.12 C38.2@231.38,1771.93 ; v1(122,2395) 132,2385 254,2385 ; v1(216,2655) C44.1@279.94,2655 279.94,2607.5 253,2580.56 253,2386 254,2385 ; v1(240,1407.13) R18.2@230.06,1355 ; R8.1@396.07,2385.59 342.59,2385.59 342,2385 R9.1@289.94,2385 254,2385 ; R17.1@450.06,1265 399,1265 309,1355 R18.2@230.06,1355 ; C45.1@624.94,2015 624.94,1930 549.94,1855 C40.2@549.94,1770 ; C41.2@714.94,1725 654,1725 609,1770 C40.2@549.94,1770 ; v1(1482,1002) 1589,895 1904,895 2036,1027 2082,1027 2100,1009 2378,1009 v1(2564,823) ; R18.2@230.06,1355 230.06,1416.94 183,1464 183,1757.5 197.43,1771.93 C38.2@231.38,1771.93 ; C38.2@231.38,1771.93 312,1771.93 313.93,1770 C39.2@394.94,1770 C40.2@549.94,1770
  other v1: 2566.97,825.97 2567,826
VCC3.3M: C13.2 C14.2 C15.2 C16.2 C17.2 C18.2 C19.2 C20.2 C21.2 C22.2 C23.2 C24.2 C25.2 C26.2 C27.2 D1.1 R3.2 R5.2 R8.2 R9.2 U1.15 U1.23 U1.36 U1.49 U1.62 U1.72 U1.82 U1.91 U1.103 U1.114 U1.127 U1.136 U1.149 U1.159 U1.172 | length 12889.1
  Top Layer w10: C26.2@380.06,2130 380.06,2175 ; v1(406,2529) 430,2505 ; v1(407,2176) 381.06,2176 380.06,2175 ; C25.2@480,2505 430,2505 ; R3.2@675,1195.06 675,1160 ; v1(832.56,1962.19) 862,1962.19 ; v1(870.06,1159) 822,1159 ; U1.36@905.3,1548.8 966.3,1548.8 v1(977.5,1560) ; U1.23@905.3,1804.71 830.33,1804.71 810.62,1785 773.38,1785 768,1790.38 768,1833.21 786.5,1851.71 830,1851.71 845.81,1867.52 845.81,1946 862,1962.19 ; U1.15@905.3,1962.19 862,1962.19 ; v1(1050,2393) 1065.36,2377.64 U1.172@1065.36,2319.09 ; U1.49@1065.36,1310 1065.36,1266 1081,1250.36 1081,1090 1080,1089 1009,1089 1008,1090 1008,1128 960,1176 839,1176 822,1159 ; R5.2@1085.06,2610 1085.06,2566 1086.06,2565 1280,2565 1338,2507 1338,2395.74 1321.26,2379 U1.159@1321.26,2319.09 v1(1321.26,2269) 1321.26,2221.76 v1(1289.5,2190) ; U1.62@1321.26,1310 1321.26,1238.8 1325.06,1235 C17.2@1325.06,1165 1505,1165 1518.11,1178.11 v1@1518.11,1260.11 ; v1(1505.61,2256.61) 1518.11,2269.11 U1.149@1518.11,2319.09 ; v1(1518,1260) v1@1518.11,1260.11 ; U1.72@1518.11,1310 v1@1518.11,1260.11 ; U1.82@1714.96,1310 1714.96,1262.54 v1(1727.5,1250) ; U1.136@1774.02,2319.09 1774.02,2393.02 1815,2434 v1(1815,2438) ; v1(1829.51,1858.45) 1829.51,1870.95 1842.01,1883.45 U1.114@1914.39,1883.45 ; U1.91@1914.39,1430.69 1964.37,1430.69 v1(1989.37,1430.69) ; U1.103@1914.39,1666.91 v1(1964.37,1666.91) ; U1.127@1914.39,2139.35 v1(1964.37,2139.35) ; 380.06,2175 380.06,2482.5 402.56,2505 430,2505 ; 675,1160 675,1139.26 673.74,1138 D1.1@673.74,1082.4 745.4,1082.4 822,1159 ; 675,1160 676,1159 822,1159
  Layer 1 w10: v1(407,2176) 513.03,2069.97 694.85,2069.97 802.82,1962 v1(832.5,1962) ; v1(1321.26,2269) 1352.15,2299.89 1492.5,2299.89 1505.61,2286.78 v1(1505.61,2256.61) ; v1(1727.5,1250) 1802.31,1324.81 1883.49,1324.81 v1(1989.37,1430.69) ; v1(1815,2438) 1706,2329 1578,2329 v1(1505.61,2256.61) ; v1(1829.51,1858.45) 1792.5,1895.46 1792.5,1911.38 1780,1923.88 1780,1960.69 1792.5,1973.19 1931.45,1973.19 2013.91,1890.73 2767.27,1890.73 v1(2785,1873) ; v1(1964.37,2139.35) 1942.73,2160.99 1942.5,2160.99 1926.95,2176.53 1926.95,2176.77 1881.72,2222 1830,2222 1781.22,2173.22 1649.78,2173.22 1566.39,2256.61 v1(1505.61,2256.61)
  Layer 2 w10: v1(1829.51,1858.45) 1841.07,1870 ; v1(1964.37,2139.35) 1914,2088.98 1914,1907.5 1896.5,1890 1861.07,1890 1841.07,1870 ; v1(1989.37,1430.69) 2003.68,1445 2023,1445 2023,1608.28 v1(1964.37,1666.91) 1914,1717.28 1914,1870 1841.07,1870
  Bottom Layer w10: R9.2@289.94,2475 342,2475 342.59,2475.59 R8.2@396.07,2475.59 396.07,2519.07 v1(406,2529) ; v1(832.5,1962) 845.06,1974.56 845.06,1974.69 ; v1(832.56,1962.19) 845.06,1974.69 ; v1(870.06,1159) 845.06,1184 C16.2@845.06,1235 845.06,1248.5 882,1285.44 882,1534 881,1535 ; v1(977.5,1560) 952.5,1535 881,1535 ; v1(1050,2393) 1050,2371.88 1101.88,2320 1270.26,2320 v1(1321.26,2269) ; v1(1289.5,2190) 1016.69,2190 1000.04,2173.35 1000.04,2150.04 952.41,2102.41 930,2102.41 871.59,2044 846.06,2044 C13.2@845.06,2010 ; v1(1518,1260) 1544,1286 1544,1309.56 1544.5,1310.06 C18.2@1575,1310.06 1634,1310.06 1634.13,1309.94 C19.2@1695,1309.94 1695,1282.5 v1(1727.5,1250) ; v1(1815,2438) 1815,2609 1792.5,2631.5 1354.5,2631.5 1292,2694 1292,2907.5 1304.5,2920 C20.2@1740,2920 C21.2@1949.94,2920 2060,2920 2065,2915 C22.2@2170,2915 2302,2915 2312,2905 C23.2@2434.94,2905 2545,2905 2550,2900 C24.2@2655,2900 ; C27.2@2785,1825 v1(2785,1873) ; 845.06,1974.69 C13.2@845.06,2010 ; C13.2@845.06,2010 881,2010 882,2009 882,1791 881,1790 C14.2@845.06,1790 845.06,1761.97 868.92,1761.97 868.92,1635.21 844.94,1611.22 C15.2@844.94,1535 881,1535
VCC5: 5V.1 C33.1 F1.1 J1.58 J1.59 J1.60 J3.2 USB.1 | length 5301
  Top Layer w10: 5V.1@90,2575 v1(90,2616) ; USB.1@214,516.18 244,516.18 244,545 258,559 378.46,559 ; v1(269,668.46) 378.46,559 ; F1.1@421.46,475 F1.1@421.46,516 ; C33.1@580.06,830 580.06,795.44 ; v1(605,770.5) 580.06,795.44 ; J3.2@1649.02,295 v1(1649.02,336) ; 378.46,559 F1.1@421.46,516 ; 378.46,559 407.46,559 421.46,545 ; F1.1@421.46,516 421.46,545 ; 421.46,545 421.46,615 580.06,773.61 580.06,795.44
  Layer 1 w10: v1(90,2616) 90,2480 86,2476 86,851.46 v1(269,668.46)
  Bottom Layer w10: J1.58@1270,1296.06 J1.59@1270,1264.57 J1.60@1270,1233.07 1253,1233.07 1253,1216 1251,1214 1251,1007.5 1014,770.5 v1(605,770.5) 725.5,650 1335.02,650 v1(1649.02,336)
VCC_LED: C34.1 MOS1.3 R10.1 R15.2 | length 4607.2
  Top Layer w10: v1(250,755) R10.1@250,875 ; MOS1.3@2230,714.21 2230,737.5 v1(2242.5,750)
  Layer 1 w10: v1(250,755) 258,747 628.5,747 636.5,755 1833,755 1838,750 v1(2242.5,750) ; v1(1628,2475) 1760.5,2475 1775.5,2490 1854.5,2490 1931.5,2413 v1(1931.5,2385)
  Layer 2 w10: v1(2030.06,2385) 1988,2342.94 1988,2037 1940,1989 1940,1882 2023,1799 2023,1673 2040,1656 2040,1353.07 2012.5,1325.57 2012.5,862.93 2125.43,750 v1(2242.5,750)
  Bottom Layer w10: R15.2@1540.06,2475 v1(1628,2475) ; v1(1931.5,2385) C34.1@1980.06,2385 v1(2030.06,2385)
VDDA: C6.2 C7.2 R2.2 R3.1 U1.39 | length 1266
  Top Layer w10: R2.2@545.06,2105 v1(545.06,2153) ; v1(741,1456.5) 765,1432.5 ; R3.1@765,1195.06 C6.2@765,1299.94 C7.2@765,1404.94 765,1432.5 ; U1.39@905.3,1489.74 813.74,1489.74 765,1441 765,1432.5
  Layer 2 w10: v1(545.06,2153) 545.06,1652.44 v1(741,1456.5)
VREF+: J1.2 R13.1 | length 2758.5
  Layer 2 w10: v1(1022,1240) 1022,1172 1123,1071 1280,1071 1299,1090 1299,1235 1281,1253 1281,2070 1296.25,2085.25 1355,2085.25 1423.5,2153.75 1423.5,2189.5 1415,2198 1415,2313 1654,2552 1714,2552 1757,2509 2029,2509 v1(2153,2385)
  Bottom Layer w10: v1(1022,1240) 1046.57,1264.57 J1.2@1084.96,1264.57 ; v1(2153,2385) R13.1@2210.06,2385
pads on no net: J1.11 J1.12 J1.13 J1.14 J1.48 J1.49 J1.50 J1.51 J1.52 J1.53 J1.54 J2.4 J2.5 J2.6 J2.7 J2.9 J2.10 J2.11 J2.12 J2.13 J2.14 J2.15 J2.21 J2.22 J2.23 J2.26 J2.27 J2.28 J2.29 J2.30 J2.32 J2.33 J2.34 J2.35 J2.36 J2.37 J2.38 J2.39 J2.40 J2.41 J2.42 J2.43 J2.44 J2.45 J2.46 J2.47 J2.48 J2.49 J2.50 J2.51 J2.52 J2.53 J2.54 J2.55 J2.56 J2.57 J2.58 J2.59 J2.60 U1.53 U1.54 U1.55 U1.92 U1.93 U1.94 U1.95 U1.101 U3.40 U4.1 U4.2 U4.3 U4.4 U4.5 U4.6 U4.10 U4.11 U4.14 U4.15 U4.20 U4.21 U4.22 U4.23 U4.24 U4.25 U4.26 U4.27 U4.28 U4.33 U4.34 U4.35 U4.38 U4.39 U4.40 U4.45 U4.46 U4.47 U4.48 U6.9 USB.4

## Keep-outs
Keep-Out Layer:
  the board outline again, w10

## Text inside footprints (layer, text, board x,y; h text height)
J3: Top Overlay "40" at 924.7,358 h30 r180; Top Overlay "1" at 1672.7,354 h30 r180